# EAGLE board W3113 (EAGLE 6.3)
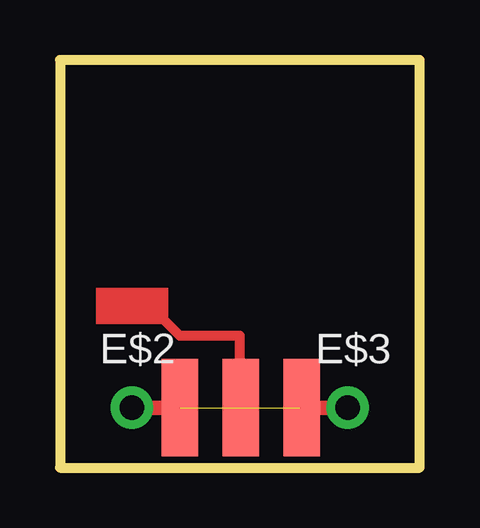
[diagram p0: board, top side]
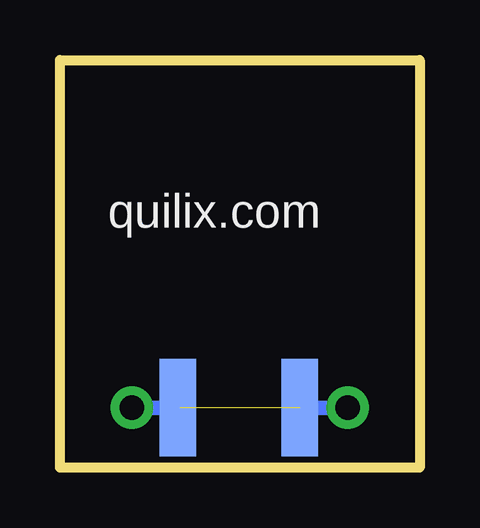
[diagram p1: board, bottom side, seen from below]

Size 15 x 17 mm. Coordinates in mm from the lower left corner, seen from the top.
Outline: 0,0 15,0 15,17 0,17 0,0
Copper layers (1*16): Top 0.035mm / dielectric 1.5mm / Bottom 0.035mm
Design rules "default": minimum track width 10mil, minimum drill 24mil, track to track 8mil, track to pad 8mil, pad to pad 8mil, via to via 8mil, smd to smd 8mil, copper to edge 40mil, drill to drill 8mil, minimum pad ring 10mil, minimum via ring 8mil, stop-mask expansion 4mil, vias tented up to drill 0mil, thermal gap 10mil
tKeepout: area 1,6 to 14,16
tRestrict: area 1,6 to 14,16

## Footprints (pad centres in the part's own frame; a part is rotated, then mirrored left to right if it is on the bottom)
SMA-EDGE = smd 1.524 x 4.064: GND@0 0,0; GND@1 5.08,0; SIG 2.54,0 | smd 1.524 x 4.064 bottom: GND@2 0,0; GND@3 5.08,0
1X01-CLEANBIG = drill 1.016 pad 1.778: 1 0,0

## Placement (x,y rotation side)
E$1  [SMA-EDGE]  5,2.5 0 top
E$2  [1X01-CLEANBIG]  3,2.5 0 top
E$3  [1X01-CLEANBIG]  12,2.5 0 top

## Library data of the parts
E$1 = SparkFun
E$2 E$3 = adafruit

## Tracks (layer width: path | path; a pad name or v marks a point on that pad's centre or on a via)
ANT  (1 unrouted)
  Top 0.61: 3.5,2.5 5,2.5 | 10,2.5 11.5,2.5
  Bottom 0.61: 3.5,2.5 5,2.5 | 10,2.5 11.5,2.5
S$2
  Top 0.406: 7.5,4 7.5,5.5 5,5.5 4,6.5
(copper drawn outside any net)
  shapes: Top area x1

## Text on the board
_bsilk: quilix.com